# Altium PCB GPS_MODULE_ZED-F9T.PcbDoc
Units mil, origin at the board's own origin, x right, y up, seen from the top; angles counter-clockwise.
Board outline 2644.72 x 1250.12 mil, 4 copper layers (Top Layer, Int1 (GND), Int2 (GND), Bottom Layer), stack 61.24 mil thick; 44 components, 32 nets, 203 pads, 245 vias.
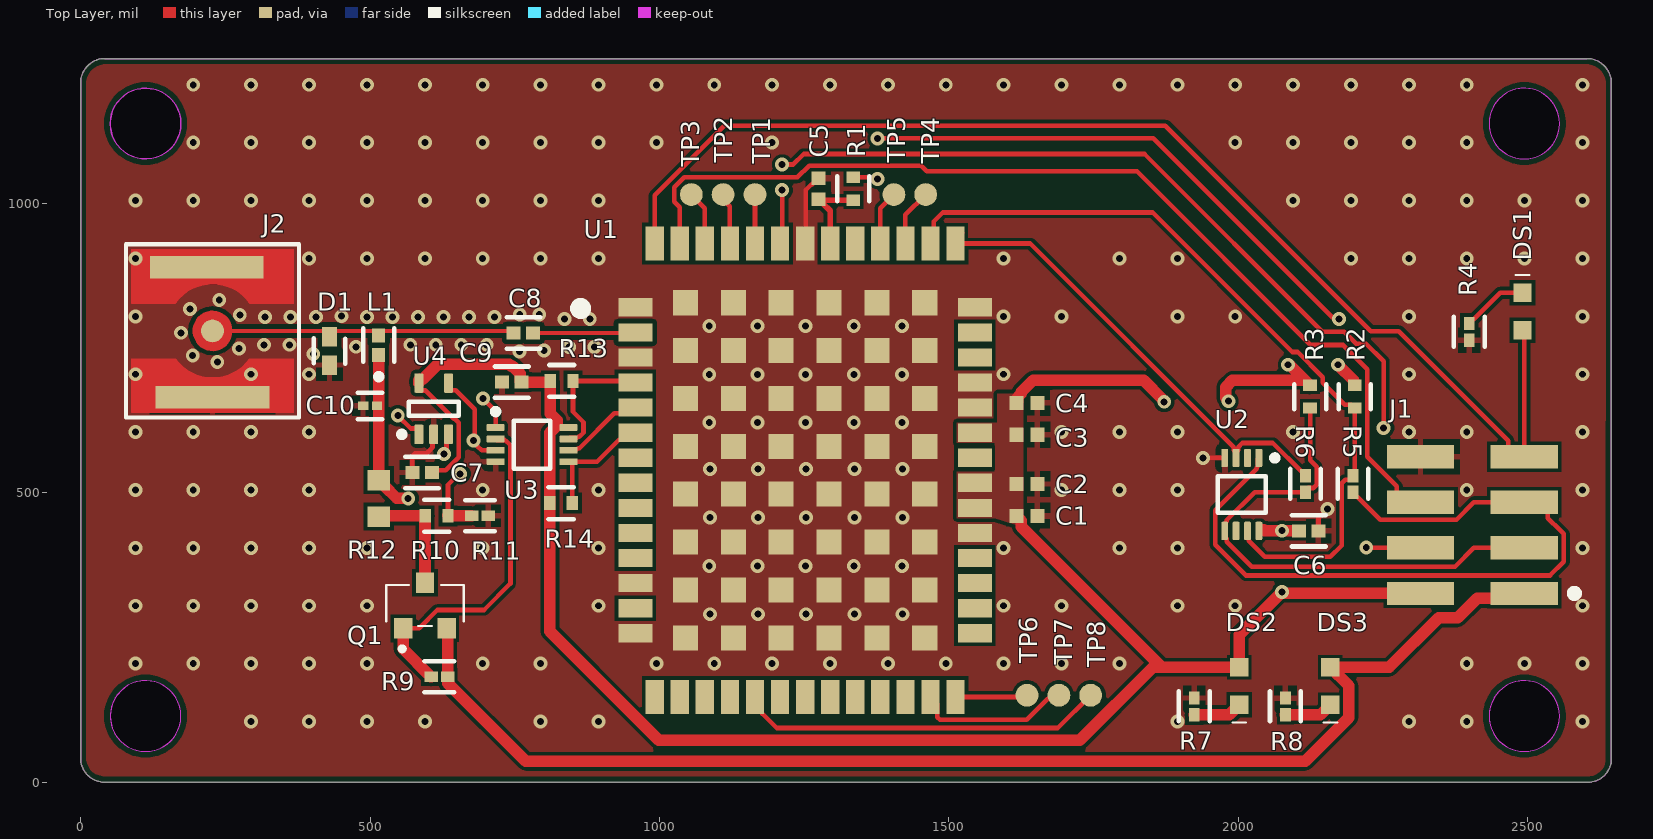
[diagram p0: Top Layer view]
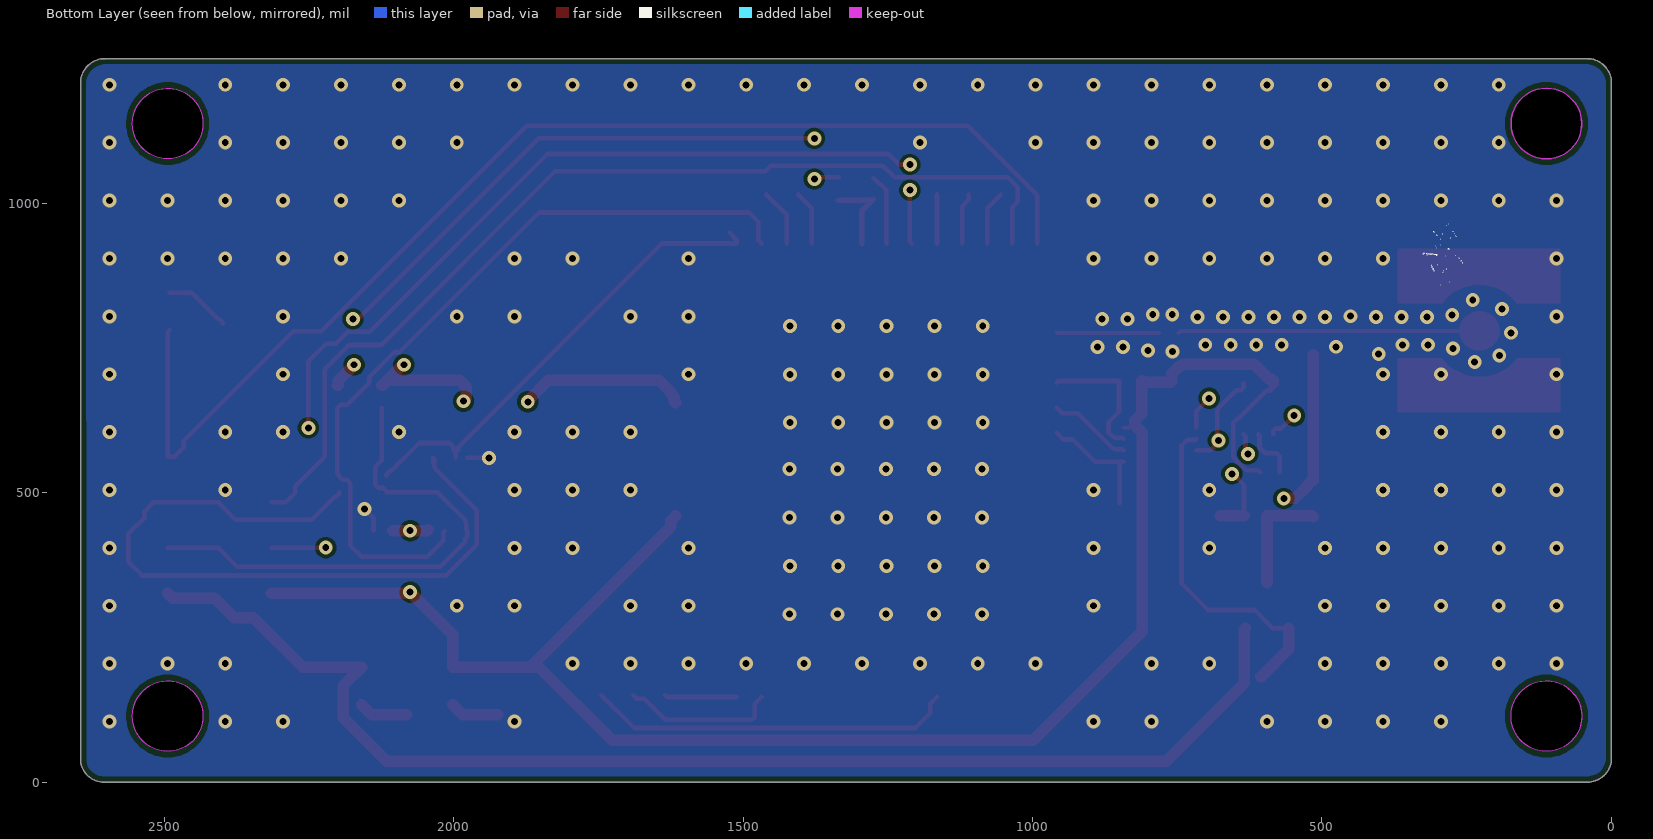
[diagram p1: Bottom Layer view, seen from below]
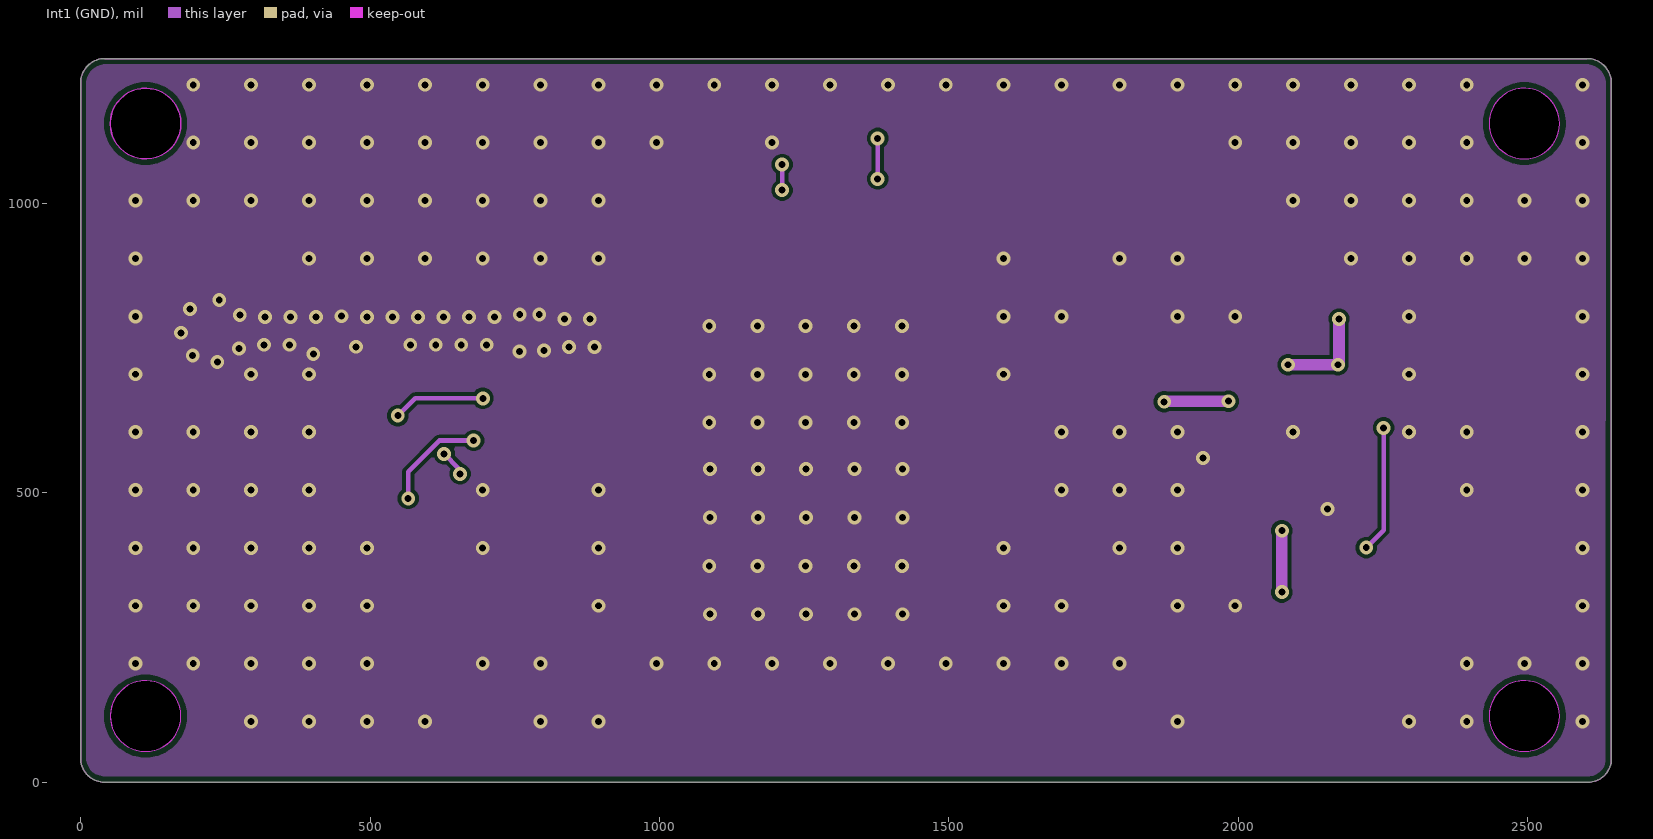
[diagram p2: Int1 (GND)]
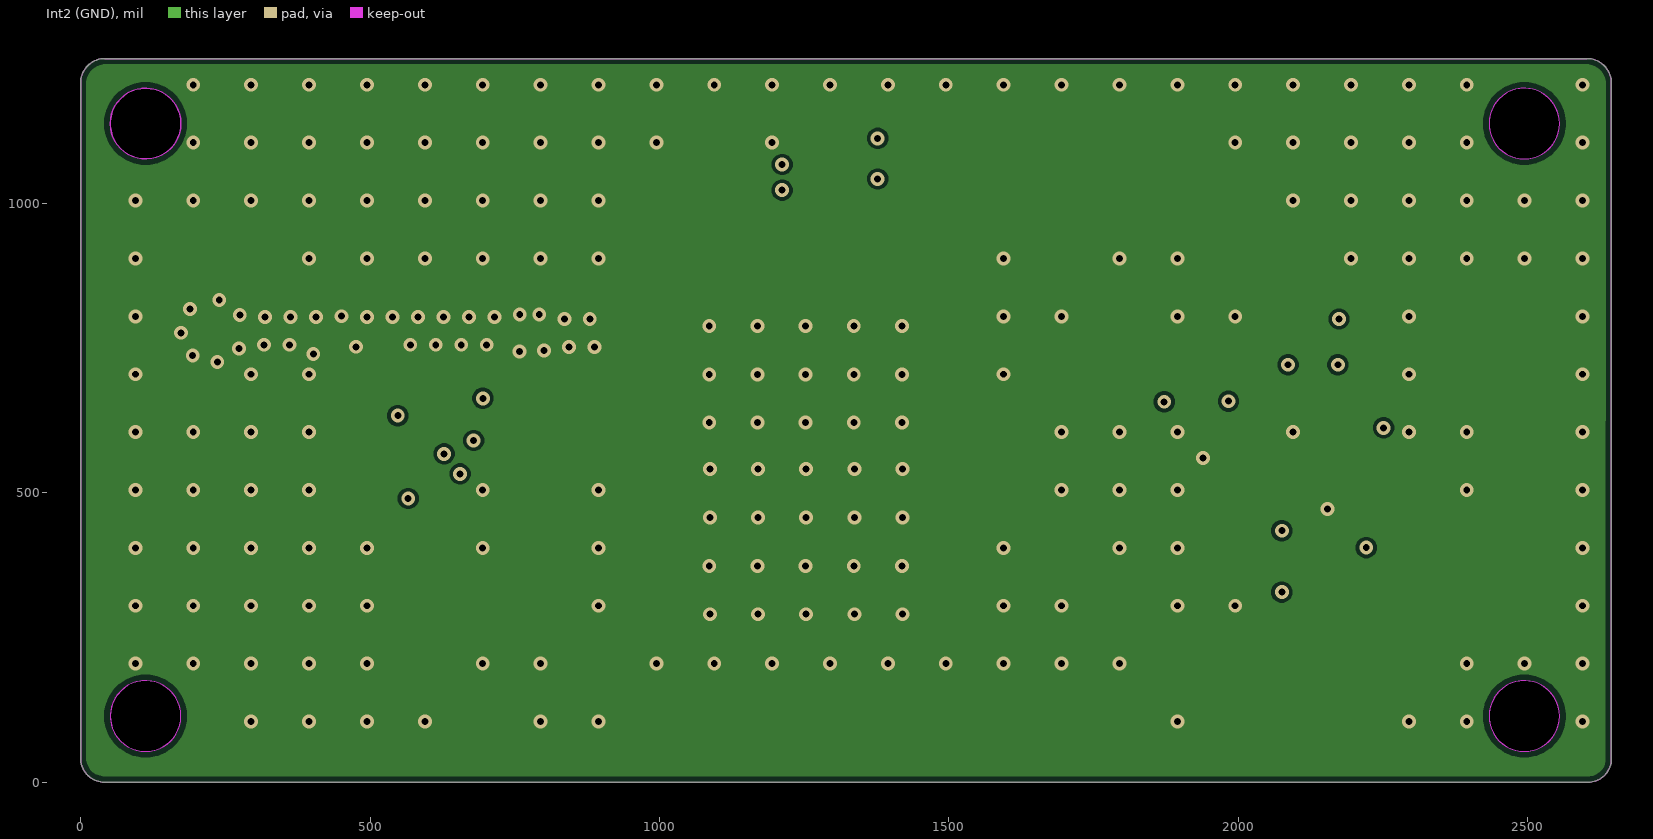
[diagram p3: Int2 (GND)]
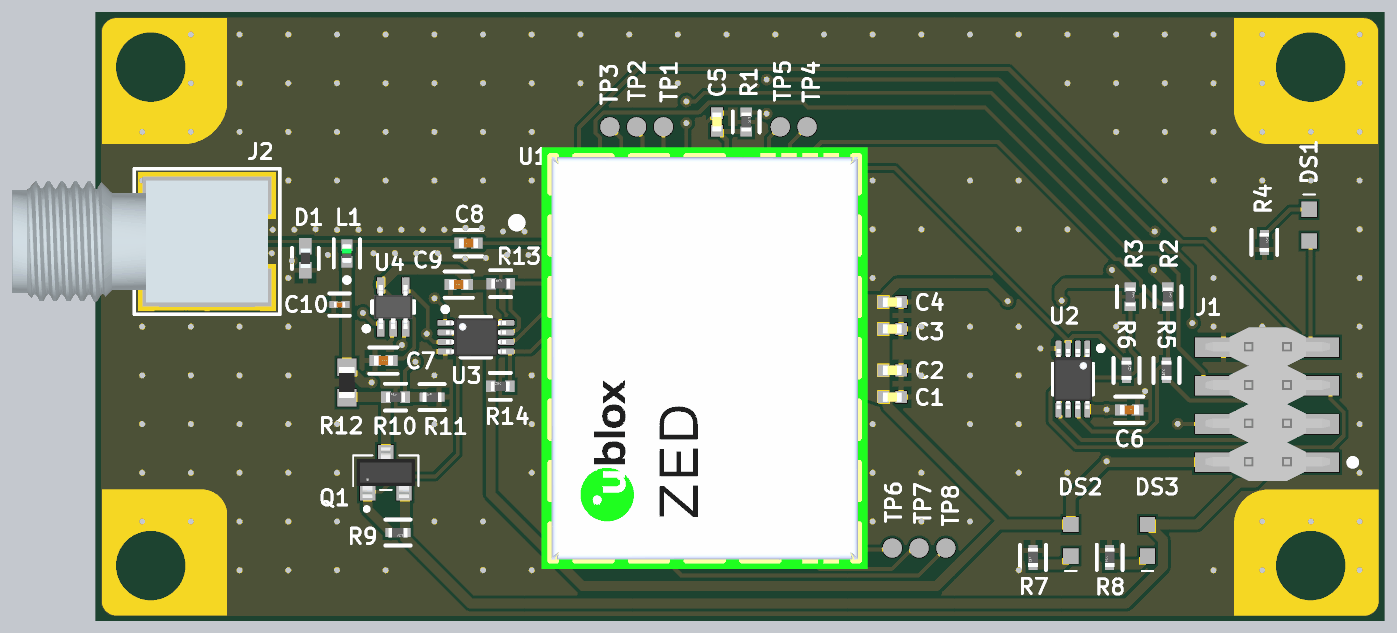
[diagram p4: 3D render of the assembled board from above, using the file's embedded part models]

## Layer stack, top to bottom
Top Solder: solder mask 0.6, SM-001, Dk 3.9
Top Layer: signal copper 1.8
Dielectric 2: prepreg 4.12, PP-021, Dk 3.7
Int1 (GND): signal copper 1.2
Dielectric 3: core 47, Core-039, Dk 4.04
Int2 (GND): signal copper 1.2
Dielectric 4: prepreg 4.12, PP-021, Dk 3.7
Bottom Layer: signal copper 1.8
Bottom Solder: solder mask 0.6, SM-001, Dk 3.9

## Board outline
0,41.14 ccw(c41.14,41.14) 41.14,0 2604.45,-0.16 ccw(c2604.41,39.96) 2644.53,39.96 2644.65,1207.48 ccw(c2602.13,1207.44) 2602.13,1249.96 42.05,1249.88 ccw(c42.09,1207.72) -0.08,1207.72
cut-out: 2433.11,1137.64 ccw(c2494.13,1137.64) 2494.13,1076.61 ccw(c2494.13,1137.64) 2555.16,1137.64 ccw(c2494.13,1137.64) 2494.13,1198.66 ccw(c2494.13,1137.64)
cut-out: 2433.11,114.02 ccw(c2494.13,114.02) 2494.13,52.99 ccw(c2494.13,114.02) 2555.16,114.02 ccw(c2494.13,114.02) 2494.13,175.04 ccw(c2494.13,114.02)
cut-out: 51.22,114.02 ccw(c112.24,114.02) 112.24,52.99 ccw(c112.24,114.02) 173.27,114.02 ccw(c112.24,114.02) 112.24,175.04 ccw(c112.24,114.02)
cut-out: 112.24,1076.61 cw(c112.24,1137.64) 51.22,1137.64 cw(c112.24,1137.64) 112.24,1198.66 cw(c112.24,1137.64) 173.27,1137.64 cw(c112.24,1137.64)

## Design rules (kind name [scope] priority, off if disabled: settings)
BoardOutlineClearance [All] p1: gap=10 ignorepadtopadclearanceinfootprint=FALSE except(0: Arc-SplitContinuation Track-SplitContinuation SMDPad-SplitContinuation THPad-SplitContinuation Via-SplitContinuation Fill-SplitContinuation Poly-SplitContinuation Region-SplitContinuation Text-SplitContinuation)
Clearance "Stitching GND" [IsStitchingVia and InNet('GND') vs (IsVia and (Not IsStitchingVia)) Or IsPad] p1: gap=5 ignorepadtopadclearanceinfootprint=FALSE
Clearance [All] p2: gap=6 ignorepadtopadclearanceinfootprint=FALSE
HoleSize [All] p1: absolutevalues=TRUE maxlimit=248.03 minlimit=11.81 maxpercent=80.000 minpercent=20.000
MinimumSolderMaskSliver [All] p1: minsoldermaskwidth=6
PolygonConnect VCC [InNet('VCC')] p1: thpad.connectstyle=Relief thpad.reliefconductorwidth=10 thpad.reliefentries=4 thpad.polygonreliefangle="90 Angle" thpad.airgapwidth=10 smdpad.connectstyle=Direct smdpad.reliefconductorwidth=10 smdpad.reliefentries=4 smdpad.polygonreliefangle="90 Angle" smdpad.airgapwidth=10 via.connectstyle=Relief via.reliefconductorwidth=10 via.reliefentries=4 via.polygonreliefangle="90 Angle" via.airgapwidth=10
PolygonConnect "RF_ANT Shielding Via" [IsShieldingVia and InNet('GND')] p2: connectstyle=Direct reliefconductorwidth=10 reliefentries=4 polygonreliefangle="90 Angle" airgapwidth=10
PolygonConnect "Via stiching" [IsStitchingVia and InNet('GND')] p3: connectstyle=Direct reliefconductorwidth=10 reliefentries=4 polygonreliefangle="90 Angle" airgapwidth=10
PolygonConnect "GPS Direct Connect" [HasFootprint('GPS_ZED-F9T')] p4: connectstyle=Direct reliefconductorwidth=10 reliefentries=4 polygonreliefangle="90 Angle" airgapwidth=10
PolygonConnect [All] p5: thpad.connectstyle=Direct thpad.reliefconductorwidth=10 thpad.reliefentries=4 thpad.polygonreliefangle="90 Angle" thpad.airgapwidth=10 smdpad.connectstyle=Relief smdpad.reliefconductorwidth=10 smdpad.reliefentries=4 smdpad.polygonreliefangle="90 Angle" smdpad.airgapwidth=10 via.connectstyle=Direct via.reliefconductorwidth=10 via.reliefentries=4 via.polygonreliefangle="90 Angle" via.airgapwidth=10
RoutingVias [All] p1: holewidth=12 width=18 viastyle="Through Hole" minholewidth=12 minwidth=18 maxholewidth=28 maxwidth=50
SilkToSolderMaskClearance [IsPad] p1: minsilkscreentomaskgap=6 clearancetoexposedcopper=TRUE
SolderMaskExpansion [All] p1: expansion=2 istentingtop=FALSE
Width RF [InNetClass('RF')] p1: maxlimit=13.24 minlimit=5 preferedwidth=13.24 toplayer_prefwidth=7 bottomlayer_prefwidth=7 impedanceprofiledriven=TRUE impedanceprofileid={1FA9C217-3A50-41E3-A2B0-EC4E4B4F348F} impedanceprofilevalue=50.000000 minimp=50.000000 maximp=50.000000 favimp=50.000000
Width [All] p2: maxlimit=20 minlimit=6 preferedwidth=8 minimp=50.000000 maximp=50.000000 favimp=50.000000
27 further rules are at their usual default settings.

## Classes and differential pairs
net class RF: RF_ANT RF_IN
component class ZED-F9T: C1 C2 C3 C4 C5 C6 DS1 DS2 DS3 J1 R1 R2 R3 R4 R5 R6 R7 R8 TP1 TP2 TP3 TP4 TP5 TP6 TP7 TP8 U1 U2
component class Antenna_Supervisor: C7 C8 C9 C10 D1 J2 L1 Q1 R9 R10 R11 R12 R13 R14 U3 U4

## Components (designator, comment, footprint, x,y, rotation, side; value= is the part's Value field where it differs from the comment)
C1 "Murata_GRM155R61E105KA12D" CAPC1005X055N 1635,460 r0 top
C2 "Murata_GRM155R61E105KA12D" CAPC1005X055N 1635,515 r0 top
C3 "Murata_GRM155R61E105KA12D" CAPC1005X055N 1635,600 r0 top
C4 "Murata_GRM155R61E105KA12D" CAPC1005X055N 1635,655 r0 top
C5 "Murata_GRM155R61E105KA12D" CAPC1005X055N 1275,1025 r90 top
C6 "100nF" FP-0402-L_1_0_0_05-W_0_5-IPC_B 2121.77,434 r0 top
C7 "100nF" FP-0402-L_1_0_0_05-W_0_5-IPC_B 590,535 r180 top
C8 "100nF" FP-0402-L_1_0_0_05-W_0_5-IPC_B 765,776 r180 top
C9 "100nF" FP-0402-L_1_0_0_05-W_0_5-IPC_B 744.76,690.89 r180 top
C10 "10nF" FP-GRM033-0_03-IPC_B 500,650 r180 top
D1 "PESD0402-140" FP-PESD0402-MFG 430,745 r90 top value=0.25pF
DS1 "Lumex_SML-LXFM0603SUGCTR" LEDS160X80X110-2N_LXFM0603-GR 2491,813 r270 top
DS2 "Lumex_SML-LXFM0603SUGCTR" LEDS160X80X110-2N_LXFM0603-GR 2001.68,166 r90 top
DS3 "Lumex_SML-LXFM0603SUGCTR" LEDS160X80X110-2N_LXFM0603-GR 2159,166 r90 top
J1 "NRPN042MAMS-RC" NRPN042MAMS-RC 2493.9,325.98 r180 top locked
J2 "SMB_131-3711-301" CONN_131-3711-301 227.95,779.53 r270 top locked
L1 "47nH 300mA" FP-LQG15HH_02-IPC_B 515,755 r90 top
Q1 "onsemi_NTR2101PT1G" SOT23_3pins_300x140x112 595,305 r0 top
R1 "1k" FP-RMCF0402-MFG 1335,1025 r90 top
R2 "1k" FP-RMCF0402-MFG 2201,666 r90 top
R3 "1k" FP-RMCF0402-MFG 2124,666 r90 top
R4 "10k" FP-RMCF0402-IPC_C 2399,777.81 r90 top
R5 "10k" FP-RMCF0402-IPC_C 2198,515 r270 top
R6 "10k" FP-RMCF0402-IPC_C 2116,515 r90 top
R7 "10k" FP-RMCF0402-IPC_C 1924,130.81 r270 top
R8 "10k" FP-RMCF0402-IPC_C 2081.32,130.81 r270 top
R9 "100k" FP-RMCF0402-IPC_C 620,181.8 r0 top
R10 "1k" FP-RMCF0402-MFG 615,460 r180 top
R11 "100k" FP-RMCF0402-IPC_C 690,460 r180 top
R12 "Vishay_RCP0603W25R0GEB" RESC1608X055N 515,490 r90 top
R13 "1k" FP-RMCF0402-MFG 831,693 r180 top
R14 "1k" FP-RMCF0402-MFG 830,482 r180 top
TP1 "SMT_100DIA" TP001V_SMT_100DIA#1 1165,1015 r90 top
TP2 "SMT_100DIA" TP001V_SMT_100DIA#1 1110,1015 r90 top
TP3 "SMT_100DIA" TP001V_SMT_100DIA#1 1055,1015 r90 top
TP4 "SMT_100DIA" TP001V_SMT_100DIA#1 1460,1015 r90 top
TP5 "SMT_100DIA" TP001V_SMT_100DIA#1 1405,1015 r90 top
TP6 "SMT_100DIA" TP001V_SMT_100DIA#2 1635,95 r90 top
TP7 "SMT_100DIA" TP001V_SMT_100DIA#2 1690,95 r90 top
TP8 "SMT_100DIA" TP001V_SMT_100DIA#3 1745,205 r90 top
U1 "ZED-F9T-00B" GPS_ZED-F9T 958.39,820.16 r270 top locked
U2 "SN74LVC3G07DCUR" DCU0008A_N 2006,497 r270 top
U3 "SN74LVC3G07DCUR" DCU0008A_N 780,583 r0 top
U4 "LPV511MGX/NOPB" DCK0005A_N 610,645 r90 top

## Footprints (in the part's own frame and the unit in brackets; to place one, negate y for a bottom-side part, rotate by r counter-clockwise, add the part's x,y. Pads: shape width x height; smd on the part's side, far side on the other; paste and mask are expansions set on the pad)
CAPC1005X055N [mm] "Chip Capacitor, Body 1.0x0.5mm, Hieght 0.55mm"
  rect 0.6x0.62 smd paste+0 mask+0.05: 1(-0.46,0) 2(0.46,0)
  body extent -0.5,-0.25 0.5,0.25, height 0.55
CONN_131-3711-301 [mm]
  round 1 smd mask+0: 1(0,0)
  rect 1x5 smd mask+0: 2(-2.794,-0.254) 3(2.916,0)
  Top Layer circle w0.013: c0,0 r0.864
  Top Layer region: 1.219,-3.556 3.581,-3.556 3.581,3.556 1.219,3.556 1.219,1.642 1.827,0.919 2.045,0 1.827,-0.918 1.219,-1.641 1.219,-1.641
  Top Layer region: -3.581,-3.556 -1.219,-3.556 -1.219,-1.641 -1.827,-0.918 -2.045,0 -1.827,0.919 -1.219,1.642 -1.219,1.642 -1.219,3.556 -3.581,3.556
  Top Layer region: -0.864,0 -0.798,-0.33 -0.611,-0.61 -0.33,-0.798 0,-0.863 0,-0.863 0.331,-0.798 0.611,-0.61 0.798,-0.33 0.864,0 0.864,0 0.798,0.331 0.611,0.611 0.331,0.798 0,0.864 0,0.864 -0.33,0.798 -0.611,0.611 -0.798,0.331 -0.864,0
  Top Layer lines w0.013: 3.581,-3.556 1.219,-3.556 1.219,-1.641 ccw(c0,0) 1.219,1.642 1.219,3.556 3.581,3.556 3.581,-3.556 ; -1.219,-3.556 -3.581,-3.556 -3.581,3.556 -1.219,3.556 -1.219,1.642 ccw(c0,0) -1.219,-1.641 -1.219,-3.556
  silkscreen extent -3.8,-3.8 3.8,3.8, body extent -3.18,-10.16 3.18,3.18, height 8.27
DCK0005A_N [mm] "SOT23, 5-Leads, Body 2.15x1.4mm, Pitch 0.65mm, IPC Medium Density"
  rrect25% 0.85x0.4 smd: 1(-1.125,0.65) 2(-1.125,0) 3(-1.125,-0.65) 4(1.125,-0.65) 5(1.125,0.65)
  silkscreen extent -1.25,-1.1 0.3,1.52, body extent -1.14,-1 1.14,1, height 0.94
DCU0008A_N [mm] "SOP, 8-Leads, Body 2.4x2.1mm, Pitch 0.5mm, IPC Medium Density"
  rrect33% 0.8x0.3 smd: 1(-1.6,0.75) 2(-1.6,0.25) 3(-1.6,-0.25) 4(-1.6,-0.75) 5(1.6,-0.75) 6(1.6,-0.25) 7(1.6,0.25) 8(1.6,0.75)
  silkscreen extent -1.72,-1.05 0.8,1.58, body extent -1.56,-1 1.56,1, height 0.9
FP-0402-L_1_0_0_05-W_0_5-IPC_B [mil]
  rect 24.23x22.54 smd paste+0 mask+0: 1(-16.87,0) 2(16.87,0)
  silkscreen extent -29,-27 29,27, body extent -35,-17 35,17, height 10
FP-GRM033-0_03-IPC_B [mil]
  rect 17.88x14.28 smd paste+0 mask+0: 1(-11.98,0) 2(11.98,0)
  silkscreen extent -21,-23 21,23, body extent -27,-13 27,13, height 10
FP-LQG15HH_02-IPC_B [mil]
  rect 24.23x22.54 smd paste+0 mask+0: 1(-16.87,0) 2(16.87,0)
  silkscreen extent -59,-27 29,27, body extent -35,-17 35,17, height 10
FP-PESD0402-MFG [mm]
  rect 0.85x0.65 smd paste+0 mask+0: 1(-0.625,0) 2(0.625,0)
  silkscreen extent -0.56,-0.69 0.55,0.7, body extent -1.15,-0.43 1.15,0.43, height 0.25
FP-RMCF0402-IPC_C [mil]
  rect 22.88x18.6 smd paste+0 mask+0: 1(-14.39,0) 2(14.39,0)
  silkscreen extent -26,-27 26,27, body extent -30,-15 30,15, height 10
FP-RMCF0402-MFG [mm]
  rect 0.5x0.6 smd paste+0 mask+0: 1(-0.5,0) 2(0.5,0)
  silkscreen extent -0.55,-0.7 0.55,0.7, body extent -0.85,-0.4 0.85,0.4, height 0.25
GPS_ZED-F9T [mm]
  rect 0.8x1.5 smd: 1(0,0) 2(1.1,0) 3(2.2,0) 4(3.3,0) 5(4.4,0) 6(5.5,0) 7(6.6,0) 8(7.7,0) 9(8.8,0) 10(9.9,0) 11(11,0) 12(12.1,0) 13(13.2,0) 14(14.3,0) 28(14.3,14.9) 29(13.2,14.9) 30(12.1,14.9) 31(11,14.9) 32(9.9,14.9) 33(8.8,14.9) 34(7.7,14.9) 35(6.6,14.9) 36(5.5,14.9) 37(4.4,14.9) 38(3.3,14.9) 39(2.2,14.9) 40(1.1,14.9) 41(0,14.9)
  rect 1.5x0.8 smd: 15(17.1,0.85) 16(17.1,1.95) 17(17.1,3.05) 18(17.1,4.15) 19(17.1,5.25) 20(17.1,6.35) 21(17.1,7.45) 22(17.1,8.55) 23(17.1,9.65) 24(17.1,10.75) 25(17.1,11.85) 26(17.1,12.95) 27(17.1,14.05) 42(-2.8,14.05) 43(-2.8,12.95) 44(-2.8,11.85) 45(-2.8,10.75) 46(-2.8,9.65) 47(-2.8,8.55) 48(-2.8,7.45) 49(-2.8,6.35) 50(-2.8,5.25) 51(-2.8,4.15) 52(-2.8,3.05) 53(-2.8,1.95) 54(-2.8,0.85)
  rect 1.1x1.1 smd: 55(-0.2,12.7) 55(-0.2,10.6) 55(-0.2,8.5) 55(-0.2,6.4) 55(-0.2,4.3) 55(-0.2,2.2) 55(1.9,12.7) 55(1.9,10.6) 55(1.9,8.5) 55(1.9,6.4) 55(1.9,4.3) 55(1.9,2.2) 55(4,10.6) 55(4,12.7) 55(4,6.4) 55(4,8.5) 55(4,2.2) 55(4,4.3) 55(6.1,10.6) 55(6.1,12.7) 55(6.1,6.4) 55(6.1,8.5) 55(6.1,2.2) 55(6.1,4.3) 55(8.2,12.7) 55(8.2,4.3) 55(8.2,6.4) 55(8.2,8.5) 55(8.2,10.6) 55(8.2,2.2) 55(10.3,12.7) 55(10.3,4.3) 55(10.3,6.4) 55(10.3,8.5) 55(10.3,10.6) 55(10.3,2.2) 55(12.4,12.7) 55(12.4,4.3) 55(12.4,6.4) 55(12.4,8.5) 55(12.4,10.6) 55(12.4,2.2) 55(14.5,8.5) 55(14.5,10.6) 55(14.5,12.7) 55(14.5,2.2) 55(14.5,4.3) 55(14.5,6.4)
  silkscreen extent -0.03,-2.48 0.13,-2.32, body extent -3.88,-1.1 18.12,15.9, height 2.49
LEDS160X80X110-2N_LXFM0603-GR [mm] "LED, Body 1.6x0.8mm, Height 1.10mm, LXFM0603-GR"
  rect 0.8x0.8 smd paste+0 mask+0.05: A(0.825,0) K(-0.825,0)
  silkscreen extent -1.6,-0.3 -1.6,0.3, body extent -0.8,-0.4 0.8,0.4, height 0.6
NRPN042MAMS-RC [mm]
  rect 2.95x1.02 smd: 1(0,0) 2(4.55,0) 3(0,-2) 4(4.55,-2) 5(0,-4) 6(4.55,-4) 7(0,-6) 8(4.55,-6)
  silkscreen extent -2.28,-0.08 -2.12,0.08, body extent -1.02,-7.05 5.48,0.95, height 5.81
RESC1608X055N [mm] "Chip Resistor, Body 1.6x0.8mm, Height 0.55mm"
  rect 0.9x1 smd paste+0 mask+0.05: 1(-0.8,0) 2(0.8,0)
  body extent -0.8,-0.4 0.8,0.4, height 0.55
SOT23_3pins_300x140x112 [mm] "SOT23, 3pins, Body Size 3.0x1.40x1.12mm, T-T = 2.40mm"
  rect 0.8x0.9 smd paste+0 mask+0.05: 1(-0.95,-1) 2(0.95,-1) 3(0,1)
  silkscreen extent -1.7,-2 1.7,0.9, body extent -1.52,-1.32 1.52,1.32, height 1.12
TP001V_SMT_100DIA#1 [mm] "Test Point, 1pin, Surface Mount 1.00mm Diameter"
  round 1 smd paste+0 mask+0.05: 1(0,0)
TP001V_SMT_100DIA#2 [mm] "Test Point, 1pin, Surface Mount 1.00mm Diameter"
  round 1 smd paste+0 mask+0.05: 1(1.397,0)
TP001V_SMT_100DIA#3 [mm] "Test Point, 1pin, Surface Mount 1.00mm Diameter"
  round 1 smd paste+0 mask+0.05: 1(-1.397,0)

## Part data
C1 C2 C3 C4 C5: library part CAP-CMP-00365-3, "CAP, CER, X5R, 1UF, 10%, 25V, 0402, 0.55MM T", Capacitance=1µF, Case/Package="0402 (1005 Metric)", Internal Part Number=825-00099-00, Manufacturer=Murata, Manufacturer Part Number=GRM155R61E105KA12D, Max Operating Temperature=85°C, Min Operating Temperature=-55°C, Supplier Part Number 1=490-10017-1-ND, Temperature Coefficient=X5R, Tolerance=±10%, Voltage Rating=25V, Applications="General Purpose", CATEGORY="Ceramic Capacitors", Composition=Ceramic, Datasheet URL=https://www.digikey.com/en/products/detail/murata-electronics/GRM155R61E105KA12D/4905139?s=N4IgTCBcDaIOICUCyBGArGhA2FBRFADGgNICCKYAIiALoC%2BQA, Height="0.022\" (0.55mm)", Mounting Type="Surface Mount, MLCC", Polarization=Non-polar, RoHS=Yes, Series=GRM155R61E, Size / Dimension="0.039\" L x 0.020\" W (1.00mm x 0.50mm)", Supplier 1=Digikey
C6 C7 C8 C9: library part CMP-14477-000330-2, "None", Case Code (Imperial)=0402, Case Code (Metric)=1005, Dielectric=X5R, Max Operating Temperature=85°C, Min Operating Temperature=-55°C, Package Quantity=10000, Tolerance=10%, Voltage Rating=50V, Capacitance=100nF, Case/Package=0402, Halogen Free="Halogen Free", Height=0.5mm, Length=0.039inch, Mount="Surface Mount", Packaging="Tape and Reel", RoHS Compliant=Yes, Termination=SMD/SMT, Thickness=0.022inch, Voltage Rating (DC)=50V, Width=0.02inch
C10: library part CMP-06035-000448-1, "Chip Multilayer Ceramic Capacitors for General Purpose, 0201, 10000pF, X7R, 15%, 10%, 16V", Dielectric=X7R, Tolerance=10%, Voltage Rating (DC)=16V, Capacitance=10nF, Length=600um, Thickness=300um, Width=300um
D1: library part CMP-08607-000011-1, "TVS DIODE 14V 40V 0402", Breakdown Voltage=14V, Capacitance=0.25pF, Clamping Voltage=40V, Manufacturer="Littelfuse Inc.", Package=PESD0402, Temperature="-55°C to +125°C", Temperature Range High=+125°C, Temperature Range Low=-55°C, Automotive=Yes, Automotive Grade="Grade 1", CATEGORY=Diode, ComponentLink2Description=Datasheet, ComponentLink2URL=https://www.littelfuse.com/~/media/electronics/datasheets/polymer_esd_suppressors/littelfuse_polymer_esd_suppressor_pesd_catalog_datasheet.pdf.pdf, Device Class L1="Circuit Protection", Device Class L2="TVS Diodes", Device Class L3=unset, Digikey Description="TVS DIODE 14V 40V 0402", Direction=Bidirectional, Height=0.43mm, Ipc Land Pattern Name=DIOC10050X33, Lead Free=Yes, Manufacturer Part Number=PESD0402-140, Number Of Channels=1, Octopart=https://octopart.com/pesd0402-140-littelfuse-74215061, Reverse Standoff Voltage=14V, RoHS=TRUE
DS1 DS2 DS3: library part LED-CMP-00021-2, "LED, GREEN, 574NM, 20MA, 20MCD MIN, 2.5VF MAX, 0603, 1.10MM T", Case/Package="0603 (1608 Metric)", Color=Green, Current - Test=20mA, Internal Part Number=838-00422-00, Manufacturer="Lumex Opto/Components Inc.", Manufacturer Part Number=SML-LXFM0603SUGCTR, Max Operating Temperature=85°C, Millicandela Rating=50mcd, Min Operating Temperature=-40°C, Supplier Part Number 1=67-2320-1-ND, Voltage - Forward (Vf) (Typ)=2.2V, CATEGORY="LED Indication - Discrete", Configuration=Independent, Datasheet URL=https://www.digikey.com/en/products/detail/lumex-opto-components-inc/SML-LXFM0603SUGCTR/7364547?s=N4IgTCBcDaIMoFkAyBaJANAYggDANhwGY4BVAcQGEAVAJRAF0BfIA, Height (Max)=1.10mm, Lens Color=Green, Lens Size="1.20mm x 0.80mm", Lens Style="Rectangle with Flat Top", Lens Transparency=Clear, Mounting Type="Surface Mount", RoHS=Yes, Size / Dimension="1.60mm L x 0.80mm W", Supplier 1=Digikey, Viewing Angle=120°, Wavelength - Peak=574nm
J1: "Dual Row 8 Position 2 mm Pitch Surface Mount Header", Color=Black, Manufacturer=Sullins, Package Quantity=1000, Supplier Part Number 1=S6009-04-ND, CATEGORY=Connectors, ComponentLink1Description=https://datasheet.ciiva.com/711/nrpnxx2mamx-rc-10495-d-711179.pdf?src-supplier=Digi-Key, ComponentLink1URL=https://datasheet.ciiva.com/711/nrpnxx2mamx-rc-10495-d-711179.pdf?src-supplier=Digi-Key, Connector Type="Male Pin", Contact Material=Brass, Contact Mating Length=0.141inch, Contact Plating=Gold, Contact Type="Male Pin", Height=1.5mm, Housing Material=Nylon, Lead Free="Lead Free", Length=8mm, Manufacturer Part Number=NRPN042MAMS-RC, Mount="Surface Mount", Number of Positions=8, Number of Rows=2, Packaging=Bulk, Pitch=0.079inch, Pricing 1="1=0.76000, 76=0.60237, 152=0.57618, 456=0.47143, 988=0.41904, 4940=0.37830 (USD)", RoHS=Yes, RoHS Compliant=Yes, Row Spacing=0.079inch, Stock 1=10801, Supplier 1=Digi-Key, Termination=Solder, Width=4mm
J2: library part CONN_131-3711-301, "Rf Coaxial Board Mount Connector", Case/Package=SMA, Dielectric Material=PTFE, Frequency=4Hz, Housing Color=Gold, Manufacturer="Bel Cinch", Manufacturer Part Number=131-3711-301, Max Frequency=4GHz, Max Operating Temperature=165°C, Min Operating Temperature=-65°C, Operating Frequency="0 to 4 Hz to GHz", Package Quantity=25, Supplier Part Number 1=J10507-ND, Voltage Rating=335V, Body Material=Brass, Body Plating=Gold, CATEGORY="RF / Coaxial Connectors", Center Contact Plating=Gold, ComponentLink1Description=http://www.mouser.com/Search/include/RoHSCompliant.aspx?qs=sxnx5FoGSWlI%252bs7K%252boh9Yg%3d%3d&src-supplier=Mouser, ComponentLink1URL=http://www.mouser.com/Search/include/RoHSCompliant.aspx?qs=sxnx5FoGSWlI%252bs7K%252boh9Yg%3d%3d&src-supplier=Mouser, ComponentLink2Description=http://www.mouser.com/Search/include/RoHSCompliant.aspx?qs=BzWiDxlKIe%2fRhe5ZDRBb2Q%3d%3d&src-supplier=Mouser, ComponentLink2URL=http://www.mouser.com/Search/include/RoHSCompliant.aspx?qs=BzWiDxlKIe%2fRhe5ZDRBb2Q%3d%3d&src-supplier=Mouser, ComponentLink3Description=http://www.onlinecomponents.com/datasheet/1313711301.aspx?p=11276490&src-supplier=Onlinecomponents.com, ComponentLink3URL=http://www.onlinecomponents.com/datasheet/1313711301.aspx?p=11276490&src-supplier=Onlinecomponents.com, ComponentLink4Description=http://www.mouser.com/Search/include/RoHSCompliant.aspx?qs=sxnx5FoGSWlgU0HI%252bkNgTA%3d%3d&src-supplier=Mouser, ComponentLink4URL=http://www.mouser.com/Search/include/RoHSCompliant.aspx?qs=sxnx5FoGSWlgU0HI%252bkNgTA%3d%3d&src-supplier=Mouser, ComponentLink5Description=http://www.mouser.com/Search/include/RoHSCompliant.aspx?qs=p2XSgoD%252b2ikka7OcbAcBow%3d%3d&src-supplier=Mouser, ComponentLink5URL=http://www.mouser.com/Search/include/RoHSCompliant.aspx?qs=p2XSgoD%252b2ikka7OcbAcBow%3d%3d&src-supplier=Mouser, ComponentLink6Description=http://www.mouser.com/Search/include/RoHSCompliant.aspx?qs=CoHYZihNMM5AOHZHjTCMkA%3d%3d&src-supplier=Mouser, ComponentLink6URL=http://www.mouser.com/Search/include/RoHSCompliant.aspx?qs=CoHYZihNMM5AOHZHjTCMkA%3d%3d&src-supplier=Mouser, ComponentLink7Description=http://www.mouser.com/Search/include/RoHSCompliant.aspx?qs=hJAXt0VUbWsyDbF0CdNvSg%3d%3d&src-supplier=Mouser, ComponentLink7URL=http://www.mouser.com/Search/include/RoHSCompliant.aspx?qs=hJAXt0VUbWsyDbF0CdNvSg%3d%3d&src-supplier=Mouser, Connector Type="SMB,Male Pin", Contact Material=Brass, Contact Plating=Gold,Nickel, Fastening Type=SNAP-ON, Gender=Female, Impedance=50R, Mount="Surface Mount", Orientation="Right Angle", Packaging=Bulk, Plating=Nickel, Polarity=Reverse, Pricing 1="1=7.75000, 10=7.00900, 25=6.62160, 50=6.46000, 100=6.13700, 250=5.49100, 500=5.16800, 1000=4.52200 (USD)", RoHS=Yes, Shell Plating=Nickel, Stock 1=475, Supplier 1=Digi-Key, Termination=Solder
L1: library part CMP-06042-015783-1, "Multilayer type RF Inductor 47nH ±5% 0.72Ω 300mA 0402", Case Code (Imperial)=0402, Case Code (Metric)=1005, Current Rating=200mA, DC Resistance (DCR)=720mR, Inductance=47nH, Max Operating Temperature=125°C, Min Operating Temperature=-55°C, Package Quantity=1, Self Resonant Frequency=1GHz, Test Frequency=100MHz, Tolerance=5%, Case/Package=0402, Core Material=Air, DC Current=200mA, Depth=0.55mm, Height=0.5mm, Height - Seated (Max)=0.022inch, Lead Free="Lead Free", Length=1mm, Max DC Current=200mA, Military Standard=Not, Mount="Surface Mount", Packaging="Tape and Reel", Q Factor=8, Radiation Hardening=No, Rated Current-Max=200mA, Series=LQG15HS, Shielding=Unshielded, Termination=SMD/SMT, Width=0.02inch
Q1: library part XQR-CMP-00012-1, "MOSFET, P-CH, 8VDS, 3.7A ID, 0.052 OHM RDS(ON)@4.5VGS/3.5A, SOT-23-3", Case/Package="TO-236-3, SC-59, SOT-23-3", Current - Continuous Drain (Id) @ 25°C="3.7A (Ta)", Drain to Source Voltage (Vdss)="8 V", Drive Voltage (Max Rds On, Min Rds On)="1.8V, 4.5V", Input Capacitance (Ciss) (Max) @ Vds="1173 pF @ 4 V", Internal Part Number=839-00735-00, Manufacturer=onsemi, Manufacturer Part Number=NTR2101PT1G, Max Operating Temperature=150°C, Min Operating Temperature=-55°C, Power Dissipation (Max)="960mW (Ta)", Supplier Part Number 1=NTR2101PT1GOSCT-ND, CATEGORY="FETs, MOSFETs - Single", Datasheet URL=https://www.digikey.com/en/products/detail/onsemi/ntr2101pt1g/687095, FET Type=P-Channel, Mounting Type="Surface Mount", Rds On (Max) @ Id, Vgs="52mOhm @ 3.5A, 4.5V", RoHS=Yes, Supplier 1=Digikey, Technology="MOSFET (Metal Oxide)"
R1 R2 R3 R10 R13 R14: library part CMP-26527-000026-1, "1kΩ ±1% 0.063W 0402 Thick Film Chip Resistor AEC-Q200 compliant", Case Code (Imperial)=0402, Case Code (Metric)=1005, Max Operating Temperature=155°C, Max Power Dissipation=63mW, Min Operating Temperature=-55°C, Resistance=1kR, Resistor Type="Thick Film", Temperature Coefficient=100ppm/°C, Tolerance=1%, Case/Package=0402, Construction=Rectangular, Contact Plating=Tin, Depth=0.5mm, Features="Automotive AEC-Q200", Height=0.016inch, Lead Free="Lead Free", Length=1mm, Military Standard=Not, Mount="Surface Mount", Number of Terminations=2, Packaging="Tape and Reel", Power Rating=63mW, Radiation Hardening=No, RoHS Compliant=Yes, Series=RMCF, Size Code=0402, Width=0.02inch
R4 R5 R6 R7 R8: library part CMP-26527-000128-1, "10kΩ ±1% 0.063W 0402 Thick Film Chip Resistor AEC-Q200 compliant", Case Code (Imperial)=0402, Case Code (Metric)=1005, Max Operating Temperature=155°C, Max Power Dissipation=63mW, Min Operating Temperature=-55°C, Power Rating=62.5mW, Resistance=10kR, Resistor Type="Thick Film", Temperature Coefficient=100ppm/°C, Tolerance=1%, Case/Package=0402, Construction=Rectangular, Contact Plating=Tin, Depth=0.5mm, Features="Automotive AEC-Q200", Height=0.016inch, Lead Free="Lead Free", Length=1mm, Military Standard=Not, Mount="Surface Mount", Number of Terminations=2, Packaging="Tape and Reel", Radiation Hardening=No, RoHS Compliant=Yes, Series=RMCF, Size Code=0402, Width=0.02inch
R9 R11: library part CMP-2000-06984-2, "100kΩ ±1% 0.063W 0402 Thick Film Chip Resistor AEC-Q200 compliant", Case Code (Imperial)=0402, Case Code (Metric)=1005, Max Operating Temperature=155°C, Max Power Dissipation=63mW, Min Operating Temperature=-55°C, Power Rating=62.5mW, Resistance=100kR, Resistor Type="Thick Film", Temperature Coefficient=100ppm/°C, Tolerance=1%, Case/Package=0402, Construction=Rectangular, Contact Plating=Tin, Depth=0.5mm, Features="Automotive AEC-Q200", Height=0.016inch, Lead Free="Lead Free", Length=1mm, Military Standard=Not, Mount="Surface Mount", Number of Terminations=2, Packaging="Tape and Reel", Radiation Hardening=No, RoHS Compliant=Yes, Series=RMCF, Size Code=0402, Width=0.02inch
R12: library part RES-CMP-00725-3, "RES, 25 OHM, 2%, 1.5W, 150PPM/C, 0603", Case/Package="0603 (1608 Metric)", Internal Part Number=822-00198-00, Manufacturer=Vishay, Manufacturer Part Number=RCP0603W25R0GEB, Max Operating Temperature=155°C, Min Operating Temperature=-65°C, Power (Watts)=1.5W, Resistance=25, Supplier Part Number 1=541-2654-1-ND, Temperature Coefficient=±150ppm/°C, Tolerance=±2%, CATEGORY="Chip Resistor - Surface Mount", Composition="Thick Film", Datasheet URL=https://www.digikey.com/en/products/detail/vishay-dale/RCP0603W25R0GEB/5481868?s=N4IgTCBcDaIEoGEAKAGAbCgzAdTAVjhQHEBRAIRAF0BfIA, Features="Moisture Resistant", Height="0.023\" (0.58mm)", RoHS=Yes, Series=RCP, Size / Dimension="0.063\" L x 0.032\" W (1.60mm x 0.81mm)", Supplier 1=Digikey
TP1 TP2 TP3 TP4 TP5 TP6 TP7 TP8: library part TPS-CMP-00004-3, "TEST POINT, PC, SMT, 1.00MM DIA", CATEGORY="Test Points", Mounting Type="1.00mm Dia Pad", Size / Dimension="1.00mm Dia Pad", Type="PC Test Point, Surface Mount"
U1: library part GPS_ZED-F9T, "Multi-band GNSS Receiver with Nanosecond-level Timing Accuracy", Case/Package=SMD/SMT, Manufacturer=u-blox, Max Operating Temperature=85°C, Min Operating Temperature=-40°C, Supplier Part Number 1=672-1197-1-ND, CATEGORY="RF Receivers, Transceivers", ComponentLink1Description=https://www.u-blox.com/sites/default/files/ZED-F9T_ProductSummary_%28UBX-18011626%29.pdf?src-supplier=Digi-Key, ComponentLink1URL=https://www.u-blox.com/sites/default/files/ZED-F9T_ProductSummary_%28UBX-18011626%29.pdf?src-supplier=Digi-Key, Interface=I2C,SPI,USB,UART, Manufacturer Part Number=ZED-F9T-00B, Packaging="Tape and Reel", Pricing 1="1=199.00000, 10=198.80000, 50=180.89020 (USD)", RoHS=Yes, Sensitivity=-166dBm, Stock 1=826, Supplier 1=Digi-Key
U2 U3: library part CMP-0859-00615-3, "Triple Buffer/Driver With Open-Drain Output, DCU0008A, LARGE T&R", F @ Nom Voltage(Max)(Mhz)=150, Generic Part Number=SN74LVC3G07, ICC @ Nom Voltage(Max)(mA)=0.01, Manufacturer="Texas Instruments", Operating Temperature Range(C)="-40 to 125,-40 to 85", Rating=Catalog, tpd @ Nom Voltage(Max)(ns)=8.3,4.8,4.2,3.4, Voltage(Nom)(V)=1.8,2.5,3.3,5, 3-State Output=No, Bits(#)=3, DatasheetVersion=SCES365K, Input Type=CMOS/TTL, Logic=True, Output Drive (IOL/IOH)(Max)(mA)=32/-32, Output Type=CMOS, PackageReference=DCU0008A, Schmitt Trigger=No, Sub-Family="Non-Inverting Buffer/Driver", Technology Family=LVC, VCC(Max)(V)=5.5, VCC(Min)(V)=1.65
U4: library part CMP-0055-01065-3, "micropower Rail-to-Rail Input and Output Operational Amplifier, 5-pin SC-70, Pb-Free", Manufacturer="Texas Instruments", Package Reference=DCK0005A, PackageTopMarking=A91*XTT, PowerWise=Y, Code_IPC=SOT353-5, Code_JEDEC=MO-203-AA, Code_JEITA=SC-88A, ComponentLink1Description="Datasheet URL", ComponentLink1URL=http://www.ti.com/general/docs/lit/getliterature.tsp?genericPartNumber=LPV511&fileType=pdf, CompType=Amplifiers, PackageDescription="Molded SC-70, 2 x 1.25 x .9mm, 5 Lead, 0.65mm Pitch", PinCount=5, RoHS=Y

## Via types
v1: diameter 24, hole 12, Top Layer to Bottom Layer, tented top, 245 vias

## Nets (pads, with @x,y where several pads share a name; then routed paths per layer and width w, separated by ;. In a path a pad name is that pad's centre, name@x,y a point inside that pad or via, vN(x,y) a via of type N, cw(c..) or ccw(c..) an arc to the next point about the centre after c; other vN are vias at no path point)
ANT_DET: R13.1 U1.4 U3.7 | length 235.9
  Top Layer w8: U3.7 844.9,594.75 857.55,594.75 859.43,596.62 861.74,596.62 868.74,603.62 868.74,621.43 850.68,639.49 R13.1 955.62,693 U1.4
ANT_OFF: U1.5 U3.6 | length 146
  Top Layer w8: U3.6 844.9,575.06 857.55,575.06 859.43,576.94 861.85,576.94 921.99,637.08 948.53,637.08 U1.5
ANT_SHORT_N: R14.1 U1.6 U3.5 | length 208.4
  Top Layer w8: U3.5 U3.5@847.78,553.47 ; R14.1 849.68,551.57 U3.5@847.78,553.47 ; U1.6 946.64,591.87 930.53,591.87 892.13,553.47 U3.5@847.78,553.47
GND: C1.2 C2.2 C3.2 C4.2 C5.2 C6.2 C7.2 C9.2 C10.2 D1.1 J1.8 J2.2 J2.3 R4.1 R7.1 R8.1 R11.1 U1.1 U1.3 U1.12 U1.14 U1.32 U1.37 U1.38 U1.41 U1.48 U1.55 U2.4 U3.4 U4.2 | length 298
  Top Layer w8: C7.2 573.13,563.29 577.81,567.98 597.76,567.98 608.03,578.25 608.03,598.74 U4.2 ; U1.48 1252.8,931.5 1252.8,1022.84 1261.76,1031.8 1263.3,1031.8 1274.61,1043.11 C5.2 ; v1(1939,560) U2.4 ; C6.2 2138.64,456.64 v1(2154,472)
  other v1: 294.67,104.59 394.67,104.59 494.67,104.59 594.67,104.59 794.67,104.59 894.67,104.59 1894.67,104.59 2294.67,104.59 2394.67,104.59 2594.67,104.59 94.67,204.59 194.67,204.59 294.67,204.59 394.67,204.59 494.67,204.59 694.67,204.59 794.67,204.59 994.67,204.59 1094.67,204.59 1194.67,204.59 1294.67,204.59 1394.67,204.59 1494.67,204.59 1594.67,204.59 1694.67,204.59 1794.67,204.59 2394.67,204.59 2494.67,204.59 2594.67,204.59 1087,290 1170.25,290 1253.5,290 1336.75,290 1420,290 94.67,304.59 194.67,304.59 294.67,304.59 394.67,304.59 494.67,304.59 894.67,304.59 1594.67,304.59 1694.67,304.59 1894.67,304.59 1994.67,304.59 2594.67,304.59 1086,373 1169.25,373 1252.5,373 1335.75,373 1419,373 94.67,404.59 194.67,404.59 294.67,404.59 394.67,404.59 494.67,404.59 694.67,404.59 894.67,404.59 1594.67,404.59 1794.67,404.59 1894.67,404.59 2594.67,404.59 1087,457 1170.25,457 1253.5,457 1336.75,457 1420,457 94.67,504.59 194.67,504.59 294.67,504.59 394.67,504.59 694.67,504.59 894.67,504.59 1694.67,504.59 1794.67,504.59 1894.67,504.59 2394.67,504.59 2594.67,504.59 1087,541 1170.25,541 1253.5,541 1336.75,541 1420,541 94.67,604.59 194.67,604.59 294.67,604.59 394.67,604.59 1694.67,604.59 1794.67,604.59 1894.67,604.59 2094.67,604.59 2294.67,604.59 2394.67,604.59 2594.67,604.59 1086,621 1169.25,621 1252.5,621 1335.75,621 1419,621 1086,704 1169.25,704 1252.5,704 1335.75,704 1419,704 94.67,704.59 294.67,704.59 394.67,704.59 1594.67,704.59 2294.67,704.59 2594.67,704.59 236.16,725.62 193.68,737.11 402.02,739.83 758,744 800.35,745.73 273.35,749.13 476,752 843.91,751.95 887.91,751.95 316.89,755.47 360.89,755.47 569.6,755.47 613.6,755.47 657.6,755.47 701.6,755.47 173.42,776.17 1086,788 1169.25,788 1252.5,788 1335.75,788 1419,788 835.68,800.05 879.68,800.05 318.89,803.58 362.89,803.58 406.89,803.58 494.86,803.58 538.86,803.58 582.86,803.58 626.86,803.58 670.86,803.58 714.86,803.58 94.67,804.59 450.88,804.84 1594.67,804.59 1694.67,804.59 1894.67,804.59 1994.67,804.59 2294.67,804.59 2594.67,804.59 275.02,806.96 758.68,807.53 792.32,807.53 188.74,817.41 239.55,832.98 94.67,904.59 394.67,904.59 494.67,904.59 594.67,904.59 694.67,904.59 794.67,904.59 894.67,904.59 1594.67,904.59 1794.67,904.59 1894.67,904.59 2194.67,904.59 2294.67,904.59 2394.67,904.59 2494.67,904.59 2594.67,904.59 94.67,1004.59 194.67,1004.59 294.67,1004.59 394.67,1004.59 494.67,1004.59 594.67,1004.59 694.67,1004.59 794.67,1004.59 894.67,1004.59 2094.67,1004.59 2194.67,1004.59 2294.67,1004.59 2394.67,1004.59 2494.67,1004.59 2594.67,1004.59 194.67,1104.59 294.67,1104.59 394.67,1104.59 494.67,1104.59 594.67,1104.59 694.67,1104.59 794.67,1104.59 894.67,1104.59 994.67,1104.59 1194.67,1104.59 1994.67,1104.59 2094.67,1104.59 2194.67,1104.59 2294.67,1104.59 2394.67,1104.59 2594.67,1104.59 194.67,1204.59 294.67,1204.59 394.67,1204.59 494.67,1204.59 594.67,1204.59 694.67,1204.59 794.67,1204.59 894.67,1204.59 994.67,1204.59 1094.67,1204.59 1194.67,1204.59 1294.67,1204.59 1394.67,1204.59 1494.67,1204.59 1594.67,1204.59 1694.67,1204.59 1794.67,1204.59 1894.67,1204.59 1994.67,1204.59 2094.67,1204.59 2194.67,1204.59 2294.67,1204.59 2394.67,1204.59 2594.67,1204.59
NetC5_1: C5.1 R1.1 U1.47 | length 142.6
  Top Layer w10: C5.1@1275.39,1006.89 C5.1@1276.97,1005.32 ; U1.47 1295,986.89 1282.2,999.69 1282.2,1000.08 C5.1@1276.97,1005.32 ; R1.1 C5.1@1276.97,1005.32
NetC10_1: C10.1 L1.1 R12.2 U3.3 U4.4 | length 619.8
  Top Layer w8: U4.4 635.59,680.95 639.46,677.08 647.8,677.08 681,643.88 v1@681,591.06 ; v1@685.46,580.54 692.84,573.16 U3.3
  Top Layer w20: L1.1 R12.2 516.97,521.5 524.68,513.78 524.68,511.81 546.5,490 v1(566,490)
  Int1 (GND) w8: v1(566,490) 566,536.11 619.89,590 v1(679,590)
NetDS1_K: DS1.K R4.2 | length 115.3
  Top Layer w8: R4.2 2399,794.33 2404.3,799.64 2406.44,799.64 2452.28,845.48 DS1.K
NetDS2_K: DS2.K R7.2 | length 84.8
  Top Layer w20: R7.2 1984.57,116.41 DS2.K
NetDS3_K: DS3.K R8.2 | length 84.8
  Top Layer w20: R8.2 2141.89,116.41 DS3.K
NetQ1_1: Q1.1 R9.1 U3.2 | length 590.9
  Top Layer w8: Q1.1 585.35,265.63 600.89,281.17 600.89,281.73 616.43,297.27 696.87,297.27 742.76,343.15 742.76,582.06 735.76,589.06 734.94,589.06 733.06,590.94 718.91,590.94 U3.2
  Top Layer w20: Q1.1 557.63,265.59 557.63,229.78 603.47,183.94 603.47,183.2 604.87,181.8 R9.1
NetQ1_3: Q1.3 R10.2 R12.1 | length 196.7
  Top Layer w20: R12.1 516.5,460 R10.2 595.32,458.35 595,458.03 Q1.3
NetR10_1: R10.1 R11.2 U4.3 | length 203.9
  Top Layer w8: v1(628,567) 628,571.33 632.19,575.52 632.19,597.31 U4.3 ; R10.1 634.68,513.72 v1@653.36,532.39
  Top Layer w20: R10.1 R11.2
  Int1 (GND) w8: v1(628,567) 652.55,542.45 652.55,535.45 v1(655.61,532.39)
NetTP1_1: TP1.1 U1.50 | length 84.6
  Top Layer w8: TP1.1 1165.08,1014.92 U1.50
NetTP2_1: TP2.1 U1.51 | length 89.5
  Top Layer w8: TP2.1 1110,1006.51 1121.77,994.74 U1.51
NetTP3_1: TP3.1 U1.52 | length 94.3
  Top Layer w8: TP3.1 1078.46,991.54 U1.52
NetTP4_1: TP4.1 U1.44 | length 99.1
  Top Layer w8: U1.44 1424.92,979.92 TP4.1
NetTP5_1: TP5.1 U1.45 | length 94.3
  Top Layer w8: U1.45 1381.61,991.61 TP5.1
NetTP6_1: TP6.1 U1.27 | length 124.7
  Top Layer w8: U1.27 1631.93,146.93 TP6.1
NetTP7_1: TP7.1 U1.26 | length 269.3
  Top Layer w8: U1.26 1479.98,135.18 1479.98,112.09 1484.66,107.4 1634.38,107.4 1670.98,144 1684,144 TP7.1
NetTP8_1: TP8.1 U1.19 | length 635
  Top Layer w8: U1.19 1176.83,135.18 1176.83,119.07 1182.64,113.26 1202.5,93.4 1688.4,93.4 TP8.1
NetU3_1: U3.1 U4.1 | length 272.5
  Top Layer w8: v1(548,633) 570.14,610.86 580.54,610.86 584.41,606.99 U4.1 ; v1(695,663) 717.01,640.99 U3.1
  Int1 (GND) w8: v1(548,633) 578,663 v1(695,663)
RF_ANT: C8.2 D1.2 J2.1 L1.2 | length 521.6
  Top Layer w7: J2.1 261.96,779.52 744.6,779.52 C8.2
RF_IN: C8.1 U1.2 | length 176.9
  Top Layer w7: C8.1 957.54,776 U1.2
RST: J1.4 U1.49 | length 1761.2
  Top Layer w8: U1.49 1212,934.01 v1(1212,1022.69) ; v1(1212,1067) 1231,1067 1249,1085 1838,1085 2145,778 2182.8,778 2203.43,757.37 2220.63,757.37 2251,727 v1(2251,612) ; v1(2221,405) 2221.28,404.72 J1.4
  Int1 (GND) w8: v1(1212,1022.69) v1(1212,1067) ; v1(2221,405) 2251,435 v1(2251,612)
RXD: R2.1 R5.1 U1.43 U2.7 | length 1369.4
  Top Layer w8: U1.43 1474,936.17 1474,968.46 1489.54,984 1852,984 2093,743 2102.48,743 2145.81,699.67 2145.81,690.19 2184.03,651.97 2195.35,651.97 R2.1 2201,532.39 R5.1 2198,527.35 2192.7,522.05 2184.56,522.05 2178.7,516.19 2178.7,408.7 2159,389 2045.88,389 2017.75,417.13 2017.75,432.1 U2.7
RXD_IN: J1.5 R5.2 U2.1 | length 1298.7
  Top Layer w8: U2.1@2035.53,551.16 U2.1 2033.62,558.09 2033.62,545.43 2031.75,543.56 2031.75,541.24 1960,469.5 1960,410 2013,357 2538.46,357 2561.97,380.5 2561.97,428.95 2556.11,434.8 2534.84,456.07 2534.84,467.39 2518.76,483.46 J1.5 2407.06,483.46 2376.98,453.39 2245.22,453.39 2205.44,493.17 2203.3,493.17 2198,498.47 R5.2
TP1: J1.6 U1.53 | length 1742.1
  Top Layer w8: U1.53 1035.16,992.86 1025.31,1002.7 1025.31,1027.3 1042.7,1044.69 1238.42,1044.69 1258.65,1064.92 1452.06,1064.92 1461.98,1055 1825,1055 2125,755 2181,755 2222.81,713.19 2222.81,561.87 2273.82,510.86 2273.82,499.54 2289.9,483.46 J1.6
TP2: DS1.A J1.7 U1.54 | length 2098.1
  Top Layer w8: U1.54 991.85,1013.63 1112.22,1134 1874,1134 2229,779 2277.1,779 2466.51,589.6 2466.51,578.28 2482.58,562.2 J1.7 2493.9,777.62 DS1.A
TXD: R6.2 U1.42 U2.3 | length 824.3
  Top Layer w8: U1.42@1523.28,949 1511.54,937.25 U1.42 1640.73,930.39 1992.38,578.74 1992.38,573.61 U2.3@1996.16,569.83 ; U2.3 U2.3@1996.16,569.83 ; R6.2 2116,531.53 2110.7,536.83 2108.56,536.83 2059.65,585.74 2006.94,585.74 1999.94,578.74 1999.94,573.61 U2.3@1996.16,569.83
TXD_OUT: J1.3 R3.1 R6.1 U2.5 | length 904.5
  Top Layer w8: R3.1 2124,556.27 2135.3,544.97 2135.3,513.81 2129.44,507.95 2121.3,507.95 2116,502.65 R6.1 2028.1,500.61 1980.25,452.76 1980.25,450.44 1978.38,448.57 1978.38,435.91 U2.5 1976.47,424.17 1980.25,420.39 1980.25,415.26 2023.51,372 2374.33,372 2407.06,404.72 J1.3
VCC: C1.1 C2.1 C3.1 C4.1 C6.1 C7.1 C9.1 DS2.A J1.2 R1.2 R2.2 R3.2 R13.2 R14.2 U1.33 U1.34 U1.36 U2.8 U3.8 U4.5 | length 5072.5
  Top Layer w6: 823,625 827.2,625 830.71,621.49 830.71,615.43 833.62,612.53 U3.8
  Top Layer w8: U4.5 584.41,680.43 588.28,676.56 595.44,676.56 644.56,627.44 646.45,627.44 653.46,620.43 653.46,561.35 630.99,538.87 610.75,538.87 C7.1 ; R1.2 1374.31,1044.68 v1(1377,1042) ; v1(1377,1112) 1853,1112 2161.94,803.06 2170.94,803.06 v1(2174,800)
  Top Layer w20: U4.5 584.41,693.9 586.54,696.02 591.14,696.02 617.14,722.02 740.38,722.02 744.24,718.16 746.63,718.16 759.52,705.27 759.52,692.16 760.79,690.89 803.75,690.89 804.04,691.19 811.16,691.19 R13.2@811.32,691.35 ; R13.2 R13.2@811.32,691.35 ; 821.76,614.75 810.32,603.3 R14.2 810.32,260.56 998.88,72 1726.22,72 1852.7,198.48 1867.99,198.48 ; 823,625 811.32,636.68 R13.2@811.32,691.35 ; C1.1 1616.89,459.61 1625.3,451.2 1625.3,441.17 1867.99,198.48 ; C4.1 1618.7,656.81 1618.7,664.7 1625.3,671.3 1625.3,673.83 1645.47,694 1836.69,694 1870,660.69 1870,660.08 1872,658.08 v1(1872,657) ; v1(1983,658) 1983,659.08 1978.11,663.97 1978.11,682.28 1989.83,694 2107.95,694 ; 2044,436 2046,434 C6.1 ; v1(2086,721) 2086.77,720.23 2089.45,720.23 2111.82,697.87 2122.19,687.5 2122.19,685.84 R3.2@2123.84,685.84 ; v1(2172,721) 2199.19,693.81 2199.19,685.84 2199.35,685.68 R2.2 ; J1.2 2078.44,325.98 2076.25,328.17 v1(2075.17,328.17) 2001.68,254.68 DS2.A 1867.99,198.48
  Int1 (GND) w8: v1(1377,1042) v1(1377,1112)
  Int1 (GND) w20: v1(1872,657) 1872.77,657.77 1882.13,657.77 1882.37,658 v1(1983,658) ; v1(2075.17,328.17) v1(2075.17,434.28) ; v1(2086,721) v1(2172,721) 2172,722.08 2174,724.08 v1(2174,800)
VCC_ANT: DS3.A J1.1 Q1.2 R9.2 | length 2227.3
  Top Layer w20: Q1.2 634.39,263.64 R9.2 634.39,170.61 769,36 2115.6,36 2190.75,111.14 2190.75,166.73 DS3.A 2260.48,198.48 2346,284 2379,284 2412.65,317.65 2485.57,317.65 J1.1
pads on no net: U1.7 U1.8 U1.9 U1.10 U1.11 U1.13 U1.15 U1.16 U1.17 U1.18 U1.20 U1.21 U1.22 U1.23 U1.24 U1.25 U1.28 U1.29 U1.30 U1.31 U1.35 U1.39 U1.40 U1.46 U2.2 U2.6

## Polygon pours and split planes (outlines as drawn)
no net on Top Solder "Top Solder-No Net" (solid, pour order 5): 2336.26,1050.51 ccw(c2410.59,1053.77) 2410.59,979.37 2632.72,979.37 2632.72,1210.74 ccw(c2602.68,1207.85) 2602.68,1238.03 2336.26,1238.03
no net on Top Solder "Top Solder-No Net" (solid, pour order 7): 11.85,40.34 ccw(c41.97,41.81) 41.97,11.65 269.33,11.65 269.33,220.51 ccw(c216.57,217.47) 216.57,270.32 11.85,270.32
no net on Top Solder "Top Solder-No Net" (solid): 2337.08,11.24 2337.08,203.95 cw(c2406.56,200.32) 2406.56,269.9 2633.53,269.9 2633.53,39.12 cw(c2603.26,41.62) 2603.26,11.24
no net on Top Solder "Top Solder-No Net" (solid, pour order 1): 11.85,979.37 11.85,1208.07 cw(c41.85,1208.03) 41.85,1238.03 269.33,1238.03 269.33,1062.24 cw(c177.52,1071.66) 177.52,979.37
no net on Bottom Solder "Bottom Solder-No Net" (solid, pour order 26): 2336.26,1050.51 ccw(c2410.59,1053.77) 2410.59,979.37 2632.72,979.37 2632.72,1210.74 ccw(c2602.68,1207.85) 2602.68,1238.03 2336.26,1238.03
no net on Bottom Solder "Bottom Solder-No Net" (solid, pour order 22): 2336.26,11.65 2336.26,204.37 cw(c2405.75,200.73) 2405.75,270.32 2632.72,270.32 2632.72,39.54 cw(c2602.44,42.03) 2602.44,11.65
no net on Bottom Solder "Bottom Solder-No Net" (solid, pour order 20): 11.85,40.34 ccw(c41.97,41.81) 41.97,11.65 269.33,11.65 269.33,220.51 ccw(c216.57,217.47) 216.57,270.32 11.85,270.32
no net on Bottom Solder "Bottom Solder-No Net" (solid, pour order 11): 11.85,979.37 11.85,1208.07 cw(c41.85,1208.03) 41.85,1238.03 269.33,1238.03 269.33,1062.24 cw(c177.52,1071.66) 177.52,979.37
GND on Top Layer "GND_L01_P034" (solid, remove dead copper, pour order 34): -20,1265 2660,1265 2660,-15 -20,-15
VCC on Top Layer "VCC_L01_P040" (solid, pour order 40): 1513.87,621.01 1583.87,621.01 1583.87,671.01 1628.87,671.01 1628.87,451.01 1644.87,435.01 1578.87,456.1 1513.87,456.1 1513.87,536.01 1578.87,536.01 1578.87,586.01 1513.87,586.01
GND on Bottom Layer "GND_L04_P030" (solid, remove dead copper, pour order 30): -20,1265 2660,1265 2660,-15 -20,-15
GND on Int1 (GND) "GND_L02_P029" (solid, remove dead copper, pour order 29): -20,1265 2660,1265 2660,-15 -20,-15
GND on Int2 (GND) "GND_L03_P041" (solid, remove dead copper, pour order 41): -20,1265 2660,1265 2660,-15 -20,-15

## Keep-outs
Keep-Out Layer:
  circle w0.5: c2494.13,114.02 r61.02
  circle w0.5: c112.24,114.02 r61.02
  circle w0.5: c2494.13,1137.64 r61.02
  circle w0.5: c112.24,1137.64 r61.02
  lines w0.5: -0.08,1207.72 cw(c42.09,1207.72) 42.05,1249.88 2602.13,1249.96 cw(c2602.13,1207.44) 2644.65,1207.48 2644.53,39.96 cw(c2604.41,39.96) 2604.45,-0.16 41.14,0 cw(c41.14,41.14) 0,41.14 -0.08,1207.72

## Other copper
Top Layer:
  pour cut-out: 990.91,799.83 993.45,798.13 995.14,795.59 995.74,792.6 995.74,761.1 995.14,758.11 993.45,755.57 990.91,753.87 987.91,753.28 928.86,753.28 925.86,753.87 923.33,755.57 921.63,758.11 921.03,761.1 921.03,764.39 801.74,764.39 801.21,761.74 799.52,759.2 796.98,757.5 793.99,756.91 769.76,756.91 766.77,757.5 764.23,759.2 762.53,761.74 761.94,764.73 761.94,787.27 762.53,790.26 764.23,792.8 766.77,794.5 769.76,795.09 793.99,795.09 796.98,794.5 799.52,792.8 801.21,790.26 801.74,787.61 921.03,787.61 921.03,792.6 921.63,795.59 923.33,798.13 925.86,799.83 928.86,800.42 987.91,800.42
  pour cut-out: 237.92,820.65 238.89,820.32 239.89,820.12 248.23,816.67 249.08,816.1 250,815.65 257.15,810.16 257.83,809.39 258.59,808.71 264.08,801.56 264.54,800.64 265.11,799.79 268.56,791.46 268.62,791.14 411.18,791.14 411.67,791.87 414.21,793.57 417.2,794.16 442.8,794.16 445.79,793.57 448.33,791.87 448.82,791.14 500.62,791.14 500.74,791.21 503.73,791.81 526.27,791.81 529.26,791.21 529.38,791.14 729.37,791.14 730.48,792.8 733.02,794.5 736.01,795.09 760.24,795.09 763.23,794.5 765.77,792.8 767.47,790.26 768.06,787.27 768.06,764.73 767.47,761.74 765.77,759.2 763.23,757.5 760.24,756.91 736.01,756.91 733.02,757.5 730.48,759.2 728.79,761.74 728.19,764.73 728.19,767.91 534.09,767.91 534.09,759.76 533.5,756.77 531.8,754.23 529.26,752.53 526.27,751.94 503.73,751.94 500.74,752.53 498.2,754.23 496.5,756.77 495.91,759.76 495.91,767.91 450.62,767.91 450.62,752.87 450.02,749.88 448.33,747.34 445.79,745.65 442.8,745.05 417.2,745.05 414.21,745.65 411.67,747.34 409.98,749.88 409.38,752.87 409.38,767.91 268.62,767.91 268.56,767.59 265.11,759.26 264.54,758.41 264.08,757.49 258.59,750.33 257.82,749.66 257.15,748.89 250,743.4 249.08,742.95 248.23,742.38 239.89,738.93 238.89,738.73 237.92,738.4 228.98,737.22 227.96,737.29 226.94,737.22 218,738.4 217.03,738.73 216.02,738.93 207.69,742.38 206.84,742.95 205.92,743.4 198.77,748.89 198.09,749.66 197.32,750.33 191.83,757.49 191.38,758.41 190.81,759.26 187.36,767.59 187.16,768.59 186.83,769.56 185.66,778.5 185.72,779.52 185.66,780.55 186.83,789.49 187.16,790.46 187.36,791.46 190.81,799.79 191.38,800.64 191.83,801.56 197.32,808.71 198.09,809.39 198.77,810.16 205.92,815.65 206.84,816.1 207.69,816.67 216.02,820.12 217.03,820.32 218,820.65 226.94,821.83 227.96,821.76 228.98,821.83

## Silkscreen, mask and mechanical layers (free items; w line width, h text height)
Bottom Overlay:
  drawing of 221 lines, arcs and shapes, not listed
Mechanical 1:
  circle w0.5: c112.24,1137.64 r61.02
  circle w0.5: c2494.13,114.02 r61.02
  circle w0.5: c112.24,114.02 r61.02
  circle w0.5: c2494.13,1137.64 r61.02
  lines w0.5: -0.08,1207.72 cw(c42.09,1207.72) 42.05,1249.88 ; 0,41.14 ccw(c41.14,41.14) 41.14,0 ; 11.85,40.34 ccw(c41.97,41.81) 41.97,11.65 ; 11.85,1208.07 cw(c41.85,1208.03) 41.85,1238.03 ; 177.52,979.37 ccw(c177.52,1071.66) 269.33,1062.24 ; 216.57,270.31 cw(c216.57,217.47) 269.33,220.51 ; 2336.26,204.37 cw(c2405.75,200.73) 2405.75,270.32 ; 2336.26,1050.51 ccw(c2410.59,1053.77) 2410.59,979.37 ; 2602.13,1249.96 cw(c2602.13,1207.44) 2644.65,1207.48 ; 2602.44,11.65 ccw(c2602.44,42.03) 2632.72,39.54 ; 2602.68,1238.03 cw(c2602.68,1207.85) 2632.72,1210.74 ; 2604.45,-0.16 ccw(c2604.41,39.96) 2644.53,39.96